# Altium PCB JMD.PcbDoc
Units mm, origin at the board's own origin, x right, y up, seen from the top; angles counter-clockwise.
Board outline 35.56 x 68.58 mm, 2 copper layers (Top Layer, Bottom Layer), stack 1.57 mm thick; 20 components, 18 nets, 74 pads, 3 vias.
Unrouted connection lines stored in the file: 1.
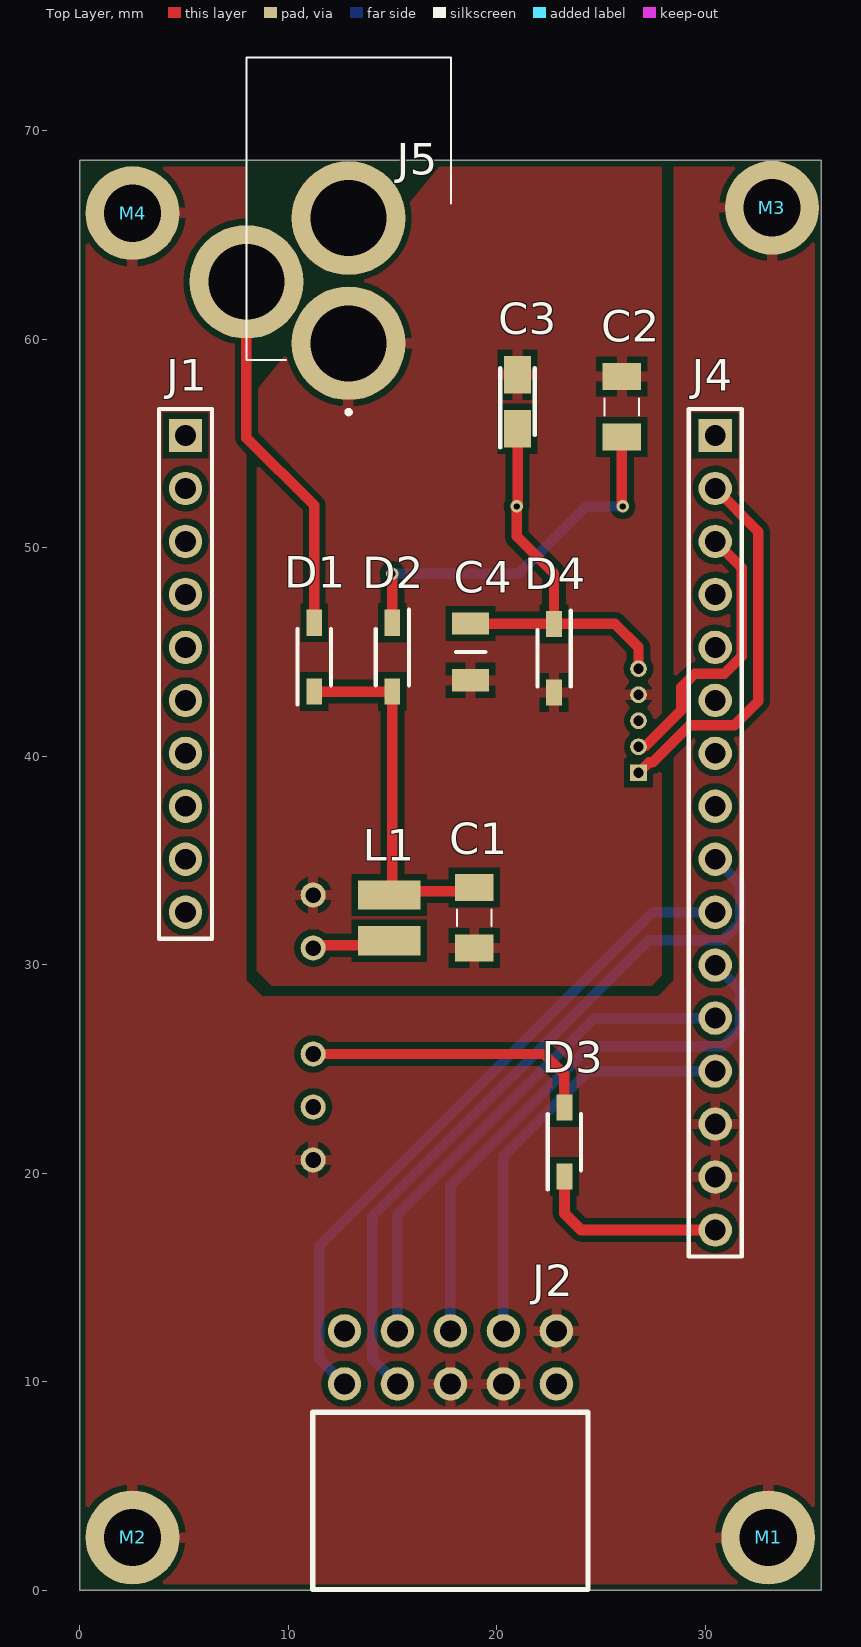
[diagram p0: Top Layer view]
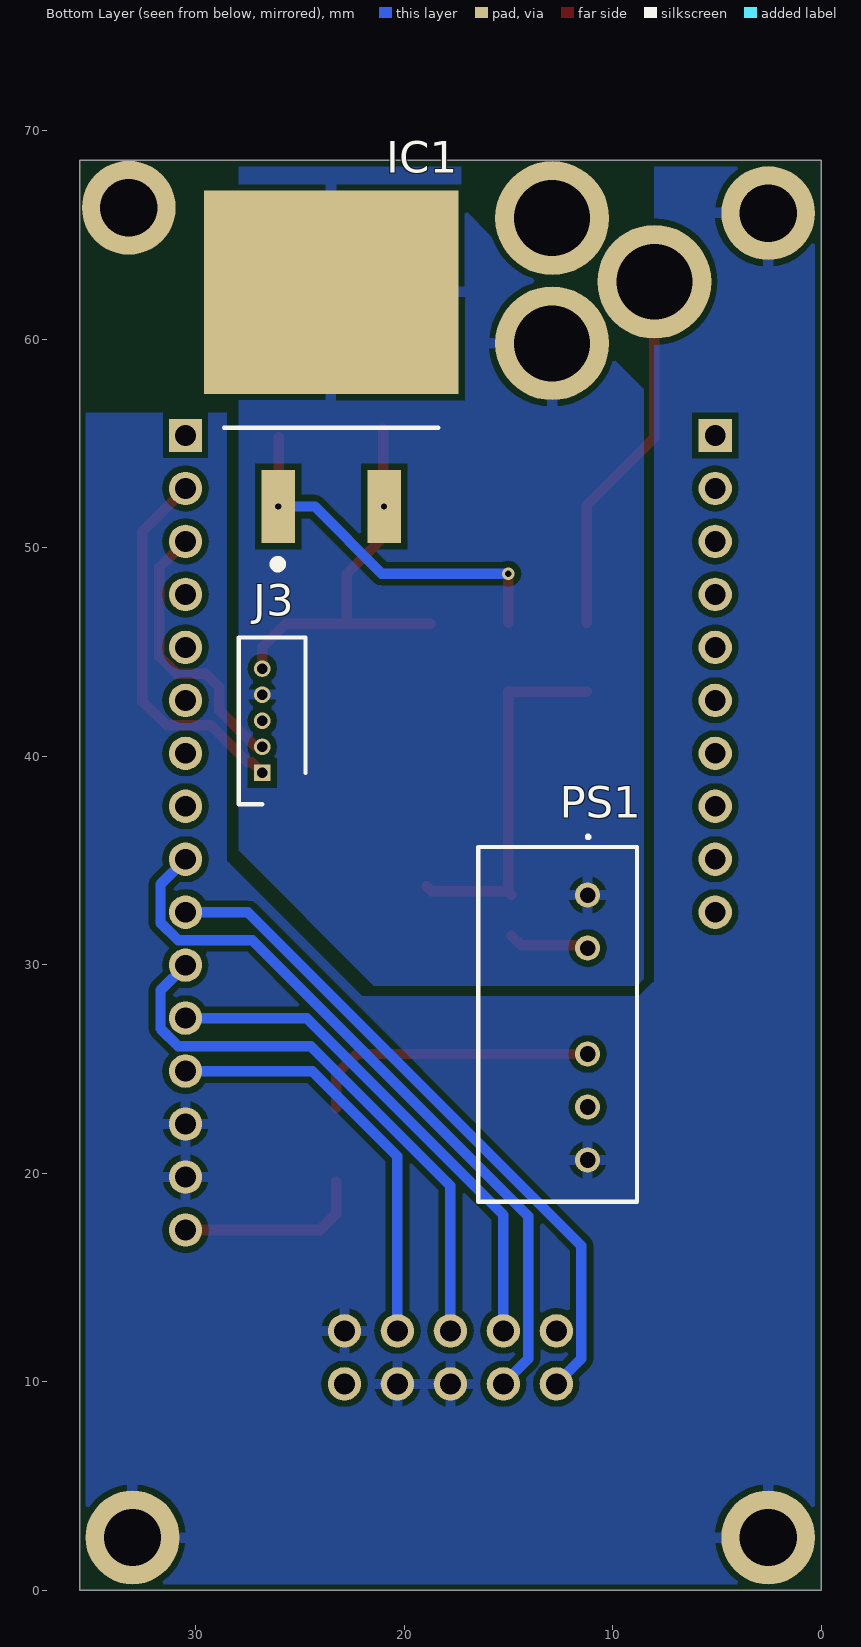
[diagram p1: Bottom Layer view, seen from below]
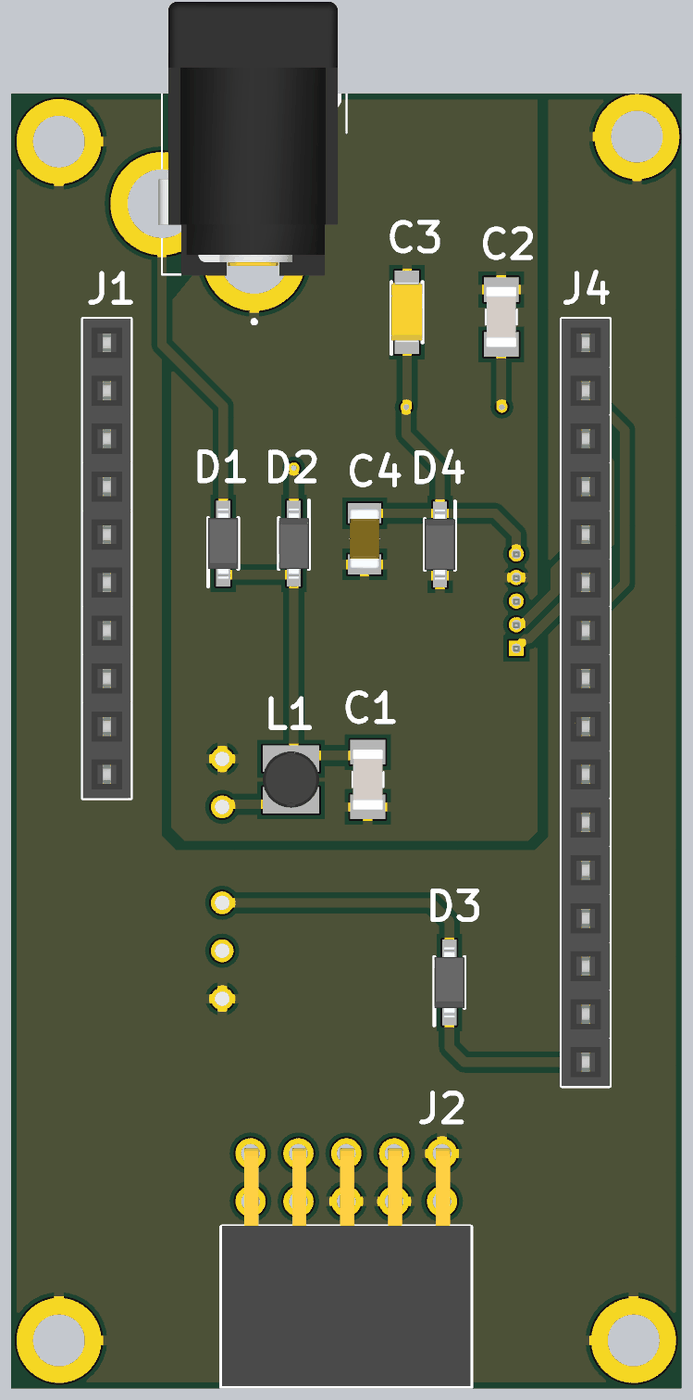
[diagram p2: 3D render of the assembled board from above, using the file's embedded part models]
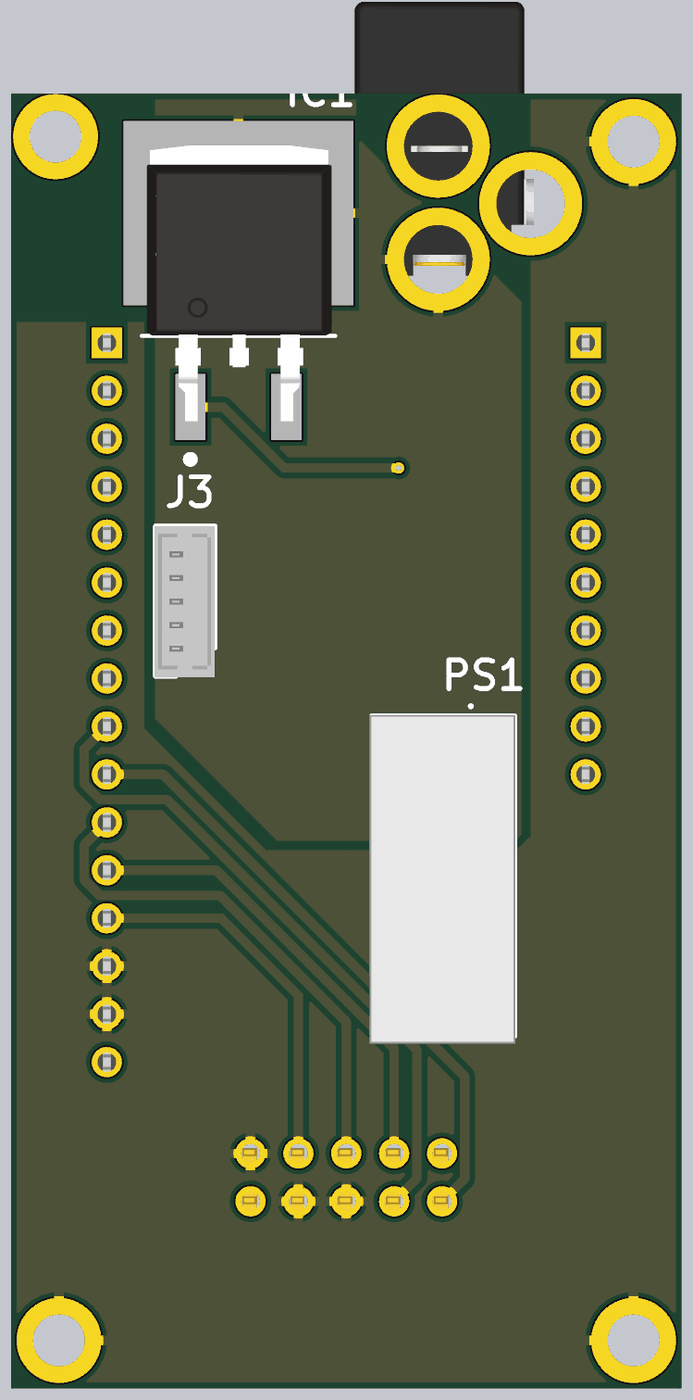
[diagram p3: 3D render of the assembled board from below, using the file's embedded part models]

## Layer stack, top to bottom
Top Solder: solder mask 0.0102, Solder Resist, Dk 3.5
Top Layer: signal copper 0.0356
Dielectric 1: core 1.4986, Core-043, Dk 4.3
Bottom Layer: signal copper 0.0356
Bottom Solder: solder mask 0.0102, Solder Resist, Dk 3.5

## Board outline
0,0 35.56,0 35.56,68.58 0,68.58

## Design rules (kind name [scope] priority, off if disabled: settings)
AssemblyTestPointUsage [All] p1 off:
AssemblyTestpoint [All] p1 off: testpointundercomponent=TRUE minsize=1.016 maxsize=2.54 preferedsize=1.524 minholesize=0 maxholesize=1.016 preferedholesize=0.813 testpointgrid=0.025 usegrid=TRUE gridtolerance=0 allowsidetop=TRUE allowsidebottom=TRUE
BoardOutlineClearance [All] p1: gap=0.3 ignorepadtopadclearanceinfootprint=FALSE
Clearance [All] p1: gap=0.3 ignorepadtopadclearanceinfootprint=FALSE except(0.15: Arc-THPad Track-THPad; 0.2: SMDPad-SMDPad SMDPad-THPad THPad-THPad)
DiffPairsRouting [All] p1 off: maxlimit=0.254 minlimit=0.254 mostfreqgap=0.254 toplayer_minwidth=0.381 toplayer_maxwidth=0.381 toplayer_prefwidth=0.381 bottomlayer_minwidth=0.381 bottomlayer_maxwidth=0.381 bottomlayer_prefwidth=0.381 maxuncoupledlength=12.7
FabricationTestPointUsage [All] p1 off: valid=0 allowmultiple=FALSE
FabricationTestpoint [All] p1 off: side=3 testpointundercomponent=TRUE minsize=1.016 maxsize=2.54 preferedsize=1.524 minholesize=0 maxholesize=1.016 preferedholesize=0.813 testpointgrid=0.025 allowsidetop=TRUE allowsidebottom=TRUE usegrid=TRUE gridtolerance=0
Height [All] p1 off: minheight=0 maxheight=25.4 prefheight=12.7
HoleSize [All] p1: absolutevalues=TRUE maxlimit=10 minlimit=0.3 maxpercent=80.000 minpercent=20.000
HoleToHoleClearance [All] p1: gap=0.3 allowstackedmicrovias=TRUE
MinimumAnnularRing [All] p1: minimumring=0.15
MinimumSolderMaskSliver [All] p1: minsoldermaskwidth=0.15
PlaneClearance [All] p1: clearance=1.016
PolygonConnect [All] p1: connectstyle=Relief reliefconductorwidth=0.5 reliefentries=4 polygonreliefangle="90 Angle" airgapwidth=0.3
RoutingVias [All] p1: holewidth=0.3 width=0.6 viastyle="Through Hole" minholewidth=0.3 minwidth=0.6 maxholewidth=0.3 maxwidth=0.6
SilkToSolderMaskClearance [IsPad] p1: minsilkscreentomaskgap=0.15 clearancetoexposedcopper=TRUE
SolderMaskExpansion [All] p1: expansion=0.102 istentingtop=FALSE
UnRoutedNet [All] p1: checkbadconnections=TRUE
Width [All] p1: maxlimit=1 minlimit=0.5 preferedwidth=0.5
18 further rules are at their usual default settings.

## Components (designator, comment, footprint, x,y, rotation, side; value= is the part's Value field where it differs from the comment)
C1 "100nF" SMD-CAP_1206_IPC_M 18.925,32.25 r90 top
C2 "100nF" SMD-CAP_1206_IPC_M 26,56.75 r270 top
C3 "22uF" CAPPM3216X180N 21,57 r90 top
C4 "47uF" CAPC3216X180N 18.75,45 r90 top
D1 "1N4148W-7-F" SOD3716X115N 11.25,44.75 r90 top
D2 "1N4148W-7-F" SOD3716X115N 15,44.75 r270 top
D3 "1N4148W-7-F" SOD3716X115N 23.25,21.5 r90 top
D4 "1N4148W-7-F" SOD3716X115N 22.75,44.7 r270 top
IC1 "L4940D2T5-TR" ST_D2PAK 23.5,64.75 r180 bottom
J1 "M20-7821046" HDR1X10 5.08,55.38 r270 top
J2 "HDR_2x5_Angled" HDR2X5 17.78,0.046 r180 top
J3 "Molex-53047-0510" SHDR5W36P0X125_1X5_800X320X420P 26.8,39.2 r90 bottom
J4 "M20-7821642" HDR1X16 30.48,55.38 r270 top
J5 "163-179PH-EX" 163179PHEX 11.535,64.95 r270 top
L1 "SDR0302-120ML" SDR0302-471KL 14.85,32.25 r0 top
M1 "TH-MOUNT-5mm_M2.5" TH-MOUNT-HOLE_5mm_M2.5 33.02,2.54 r0 top
M2 "TH-MOUNT-5mm_M2.5" TH-MOUNT-HOLE_5mm_M2.5 2.54,2.54 r0 top
M3 "TH-MOUNT-5mm_M2.5" TH-MOUNT-HOLE_5mm_M2.5 33.2,66.3 r0 top
M4 "TH-MOUNT-5mm_M2.5" TH-MOUNT-HOLE_5mm_M2.5 2.54,66.04 r0 top
PS1 "TMR_1-1211" TMR-1-1215 8.825,35.64 r270 bottom

## Footprints (in the part's own frame and the unit in brackets; to place one, negate y for a bottom-side part, rotate by r counter-clockwise, add the part's x,y. Pads: shape width x height; smd on the part's side, far side on the other; paste and mask are expansions set on the pad)
163179PHEX [mm]
  round 5.46 hole 3.64: 1(5.15,1.365) 2(2.2,-3.535) 3(-0.85,1.365)
  silkscreen extent -8.55,-3.54 8.55,6.27, body extent -8.5,-3.7 6,5.8, height 10.85
CAPC3216X180N [mm]
  rect 1.07x1.78 smd: 1(-1.36,0) 2(1.36,0)
  silkscreen extent 0,-0.7 0,0.7, body extent -1.6,-0.8 1.6,0.8, height 1.8
CAPPM3216X180N [mm]
  rect 1.8x1.3 smd: 1(-1.3,0) 2(1.3,0)
  silkscreen extent -2.2,-0.83 1.6,0.83, body extent -1.6,-0.82 1.6,0.82, height 1.8
HDR1X10 [mm] "Connector; Header; 10 Position"
  rect 1.6x1.6 hole 1: 1(0,0)
  round 1.6 hole 1: 2(2.54,0) 3(5.08,0) 4(7.62,0) 5(10.16,0) 6(12.7,0) 7(15.24,0) 8(17.78,0) 9(20.32,0) 10(22.86,0)
  silkscreen extent -1.27,-1.27 24.13,1.27, body extent -1.27,-1.27 24.13,1.27, height 8.5
HDR1X16 [mm] "Connector; Header; 16 Position"
  rect 1.6x1.6 hole 1: 1(0,0)
  round 1.6 hole 1: 2(2.54,0) 3(5.08,0) 4(7.62,0) 5(10.16,0) 6(12.7,0) 7(15.24,0) 8(17.78,0) 9(20.32,0) 10(22.86,0) 11(25.4,0) 12(27.94,0) 13(30.48,0) 14(33.02,0) 15(35.56,0) 16(38.1,0)
  silkscreen extent -1.27,-1.27 39.37,1.27, body extent -1.27,-1.27 39.37,1.27, height 8.5
HDR2X5 [mm]
  round 1.6 hole 1: 1(-5.08,-12.4) 2(-5.08,-9.86) 3(-2.54,-12.4) 4(-2.54,-9.86) 5(0,-12.4) 6(0,-9.86) 7(2.54,-12.4) 8(2.54,-9.86) 9(5.08,-12.4) 10(5.08,-9.86)
  silkscreen extent -6.6,-8.5 6.6,0, body extent -6.6,-12.67 6.6,-0.07, height 5.04
SDR0302-471KL [mm]
  rect 3x1.4 smd: 1(0,1.1) 2(0,-1.1)
  body extent -1.49,-1.5 1.49,1.5, height 3
SHDR5W36P0X125_1X5_800X320X420P [mm]
  rect 0.8x0.8 hole 0.5: 1(0,0)
  round 0.8 hole 0.5: 2(1.25,0) 3(2.5,0) 4(3.75,0) 5(5,0)
  silkscreen extent -1.5,-2.07 6.5,1.13, body extent -1.53,-2.05 6.47,1.15, height 4.23
SMD-CAP_1206_IPC_M [mm]
  rect 1.3x1.85 smd: 1(-1.45,0) 2(1.45,0)
  silkscreen extent -0.4,-0.82 0.4,0.82, body extent -1.6,-0.8 1.6,0.8, height 1.4
SOD3716X115N [mm]
  rect 1.25x0.75 smd: 1(-1.65,0) 2(1.65,0)
  silkscreen extent -2.27,-0.8 1.35,0.8, body extent -1.85,-0.8 1.85,0.8, height 1.15
ST_D2PAK [mm]
  rect 1.6x3.5 smd: 1(-2.54,-12.775) 2(2.54,-12.775)
  rect 12.2x9.75 smd: 3(0,-2.5)
  silkscreen extent -5.14,-15.74 5.14,-9, body extent -4.87,-13.52 4.95,1.08, height 4.22
TH-MOUNT-HOLE_5mm_M2.5 [mm]
  round 4.5 hole 2.75: 1(0,0)
TMR-1-1215 [mm]
  round 1.2 hole 0.75: 1(2.3,-2.375) 2(4.84,-2.375) 4(9.92,-2.375) 5(12.46,-2.375) 6(15,-2.375)
  silkscreen extent -0.55,-7.62 17,0, body extent -0.02,-7.72 17.38,0.03, height 11.4

## Part data
C1 C2: library part CAP-100NF-1206-5%-25V, "Capacitor", Manufacturer_Name=Kemet, Manufacturer_Part_Number=C1206C104J3JACTU, Mouser2 Part Number=80-C1206C104J3J, Height=1mm
C3: library part CAP-22uF-Tantal-10%-10V, "Capacitor Polarised", Manufacturer_Name=AVX, Manufacturer_Part_Number=TPSA226K010T0900, Mouser2 Part Number=581-TPSA226K010T0900, Datasheet Link=https://componentsearchengine.com/Datasheets/1/TPSA226K010T0900.pdf, Height=1.8mm
C4: library part CAP-47UF-1206-20%-10V, "Capacitor", Manufacturer_Name=Kemet, Manufacturer_Part_Number=C1206C476M8PACTU, Mouser2 Part Number=80-C1206C476M8P, Datasheet Link=http://componentsearchengine.com/Datasheets/1/C1206C476M8PACTU.pdf
D1 D2 D3 D4: "Diode", Manufacturer_Name="Diodes Inc.", Mouser2 Part Number=621-1N4148W-F, Datasheet Link=https://componentsearchengine.com/Datasheets/1/1N4148W-7-F.pdf, Height=1.15mm, Manufacturer_Part_Number=1N4148W-7-F, Mouser2 Price/Stock=https://www.mouser.com/Search/Refine.aspx?Keyword=621-1N4148W-F
IC1: "Integrated Circuit", Manufacturer_Name=STMicroelectronics, Datasheet Link=https://www.st.com/resource/en/datasheet/l4940.pdf, Manufacturer_Part_Number=L4940D2T5-TR
J1: "Connector", Manufacturer_Name=HARWIN, Mouser2 Part Number=855-M20-7821046, Datasheet Link=https://componentsearchengine.com//M20-7821046.pdf, Height=8.65mm, Manufacturer_Part_Number=M20-7821046, Mouser2 Price/Stock=https://www.mouser.com/Search/Refine.aspx?Keyword=855-M20-7821046
J2: "Connector", Manufacturer_Name="Wurth Elektronik", Manufacturer_Part_Number=613010243121, Mouser2 Part Number=710-613010243121, Datasheet Link=https://componentsearchengine.com//613010243121.pdf, Mouser2 Price/Stock=https://www.mouser.com/Search/Refine.aspx?Keyword=710-613010243121
J3: "Connector", Manufacturer_Name=Molex, Manufacturer_Part_Number=53047-0510, Mouser2 Part Number=538-53047-0510, Datasheet Link=https://componentsearchengine.com/Datasheets/1/53047-0510.pdf, Height=4.2mm, Mouser2 Price/Stock=https://www.mouser.com/Search/Refine.aspx?Keyword=538-53047-0510
J4: "Connector", Manufacturer_Name=HARWIN, Mouser2 Part Number=855-M20-7821642, Datasheet Link=https://componentsearchengine.com//M20-7821642.pdf, Height=8.65mm, Manufacturer_Part_Number=M20-7821642, Mouser2 Price/Stock=https://www.mouser.com/Search/Refine.aspx?Keyword=855-M20-7821642
J5: "Connector", Manufacturer_Name=Kobiconn, Datasheet Link=https://componentsearchengine.com/Datasheets/1/163-179PH-EX.pdf, Height=11mm, Manufacturer_Part_Number=163-179PH-EX, Mouser2 Part Number=163-179PH-EX
L1: "Inductor", Manufacturer_Name=Bourns, Mouser2 Part Number=652-SDR0302-120ML, Datasheet Link=https://www.bourns.com/docs/Product-Datasheets/SDR0302.pdf, Manufacturer_Part_Number=SDR0302-120ML
PS1: "Power Supply", Manufacturer_Name="Traco Power", Manufacturer_Part_Number="TMR 1-1211", Mouser2 Part Number=495-TMR-1-1211, Datasheet Link="https://componentsearchengine.com/Datasheets/1/TMR 1-1211.pdf", Mouser2 Price/Stock=https://www.mouser.com/Search/Refine.aspx?Keyword=495-TMR-1-1211

## Via types
v1: diameter 0.6, hole 0.3, Top Layer to Bottom Layer, 3 vias

## Nets (pads, with @x,y where several pads share a name; then routed paths per layer and width w, separated by ;. In a path a pad name is that pad's centre, name@x,y a point inside that pad or via, vN(x,y) a via of type N, cw(c..) or ccw(c..) an arc to the next point about the centre after c; other vN are vias at no path point)
FRESH_AIR_ZERO: J2.10 J4.10 | length 32.7
  Bottom Layer w0.5: J2.10 11.5,11.106 11.5,16.525 27.495,32.52 J4.10
GND: J2.1 J2.4 J2.6 J4.14 J4.15 M1.1 M2.1 M3.1 M4.1 PS1.6
GND_IN: C1.1 C2.1 C3.2 C4.1 D4.2 IC1.3 J3.4 J5.1 PS1.1
IO_R: J3.2 J4.3 | length 13.4
  Top Layer w0.5: J3.2 26.857,40.507 27.155,40.507 28.853,42.205 28.853,43.303 29.5,43.95 30.907,43.95 31.75,44.793 31.75,49.03 J4.3
IO_T: J3.1 J4.2 | length 18.2
  Top Layer w0.5: J3.1 27.307,39.707 27.487,39.707 29.259,41.48 31.387,41.48 32.55,42.643 32.55,50.77 J4.2
IO_X: J3.3
NetC1_2: C1.2 D1.1 D2.2 L1.1 | length 17.6
  Top Layer w0.5: D1.1 D2.2 L1.1@15,33.5 ; L1.1 L1.1@15,33.5 ; C1.2@18.925,33.775 18.675,33.525 15.025,33.525 L1.1@15,33.5
NetC2_2: C2.2 D2.1 IC1.1 | length 18.1
  Top Layer w0.5: D2.1 v1(15,48.75) ; C2.2 26,52.042 26.04,52.002 v1(26.04,51.975)
  Bottom Layer w0.5: v1(15,48.75) 21.063,48.75 24.288,51.975 v1(26.04,51.975)
NetD3_2: D3.2 PS1.4 | length 14.1
  Top Layer w0.5: PS1.4 22.28,25.72 23.25,24.75 D3.2
NetL1_2: L1.2 PS1.2 | length 3.9
  Top Layer w0.5: PS1.2 11.334,30.934 14.384,30.934 L1.2@14.85,31.4
NITROGEN_ZERO: J2.8 J4.9 | length 35.5
  Bottom Layer w0.5: J2.8 14.04,11.106 14.04,17.934 27.286,31.18 30.837,31.18 31.68,32.023 31.68,33.86 J4.9
SENSOR_RX: J2.5 J4.11 | length 27.5
  Bottom Layer w0.5: J2.5 17.78,19.411 24.469,26.1 30.837,26.1 31.68,26.943 31.68,28.78 J4.11
SENSOR_TX: J2.7 J4.12 | length 24.7
  Bottom Layer w0.5: J2.7 15.24,18.003 18.72,21.483 24.677,27.44 J4.12
SWT: J5.3
V3V3: J2.3 J4.13 | length 20.2
  Bottom Layer w0.5: J2.3 20.32,20.82 24.4,24.9 J4.13
V5V0: D3.1 J4.16 | length 9.1
  Top Layer w0.508: D3.1@23.25,19.6 23.25,18.075 24.045,17.28 J4.16
V5VPUMP: C3.1 C4.2 D4.1 IC1.2 J3.5 | length 19.7
  Top Layer w0.5: C4.2 18.755,46.355 22.745,46.355 D4.1 ; C3.1 21,52.042 20.96,52.002 v1(20.96,51.975) 20.96,50.54 22.75,48.75 D4.1 ; J3.5 26.8,45.22 25.67,46.35 D4.1
VIN: D1.2 J5.2 | length 17.7
  Top Layer w0.5: J5.2 8,55.28 11.25,52.03 D1.2
pads on no net: J1.1 J1.2 J1.3 J1.4 J1.5 J1.6 J1.7 J1.8 J1.9 J1.10 J2.2 J2.9 J4.1 J4.4 J4.5 J4.6 J4.7 J4.8 PS1.5

## Polygon pours and split planes (outlines as drawn)
GND_IN on Top Layer "INGND" (solid, pour order 3): 17.5,68.58 8.5,57.582 8.5,29.714 9.214,29 27.425,29 27.925,29.5 27.925,40.75 27.925,68.58
GND on Top Layer "DGND" (solid, pour order 2): 0,68.58 8,68.58 8,57 8,29.25 8.75,28.5 27.75,28.5 28.5,29.25 28.5,40.5 28.5,68.58 35.5,68.58 35.5,0.06 35.56,0 0,0
GND on Bottom Layer "GND_L02_P005" (solid, pour order 5): 28.5,56.48 35.56,56.48 35.56,0 0,0 0,68.58 8,68.58 8,29.163 8.087,29.163 8.75,28.5 22.015,28.5 28.5,34.985
GND_IN on Bottom Layer "GND_IN_L02_P004" (solid, pour order 4): 27.925,68.58 27.619,68.274 17.25,68.274 17.25,66.345 8.5,57.595 8.5,29.325 8.825,29 21.444,29 27.925,35.481

## Silkscreen, mask and mechanical layers (free items; w line width, h text height)
Mechanical 13:
  lines w0.254: 0,0 35.56,0 35.56,68.58 0,68.58 0,60.96 0,0